# Altium PCB XDRONE.PcbDoc (part 2 of 2)
Units mm, origin at the board's own origin, x right, y up, seen from the top; angles counter-clockwise.
Board outline 106 x 156 mm, 4 copper layers (Top Layer, Signal Layer 2, Signal Layer 1, Bottom Layer), stack 1.586 mm thick; 129 components, 64 nets, 369 pads, 526 vias.
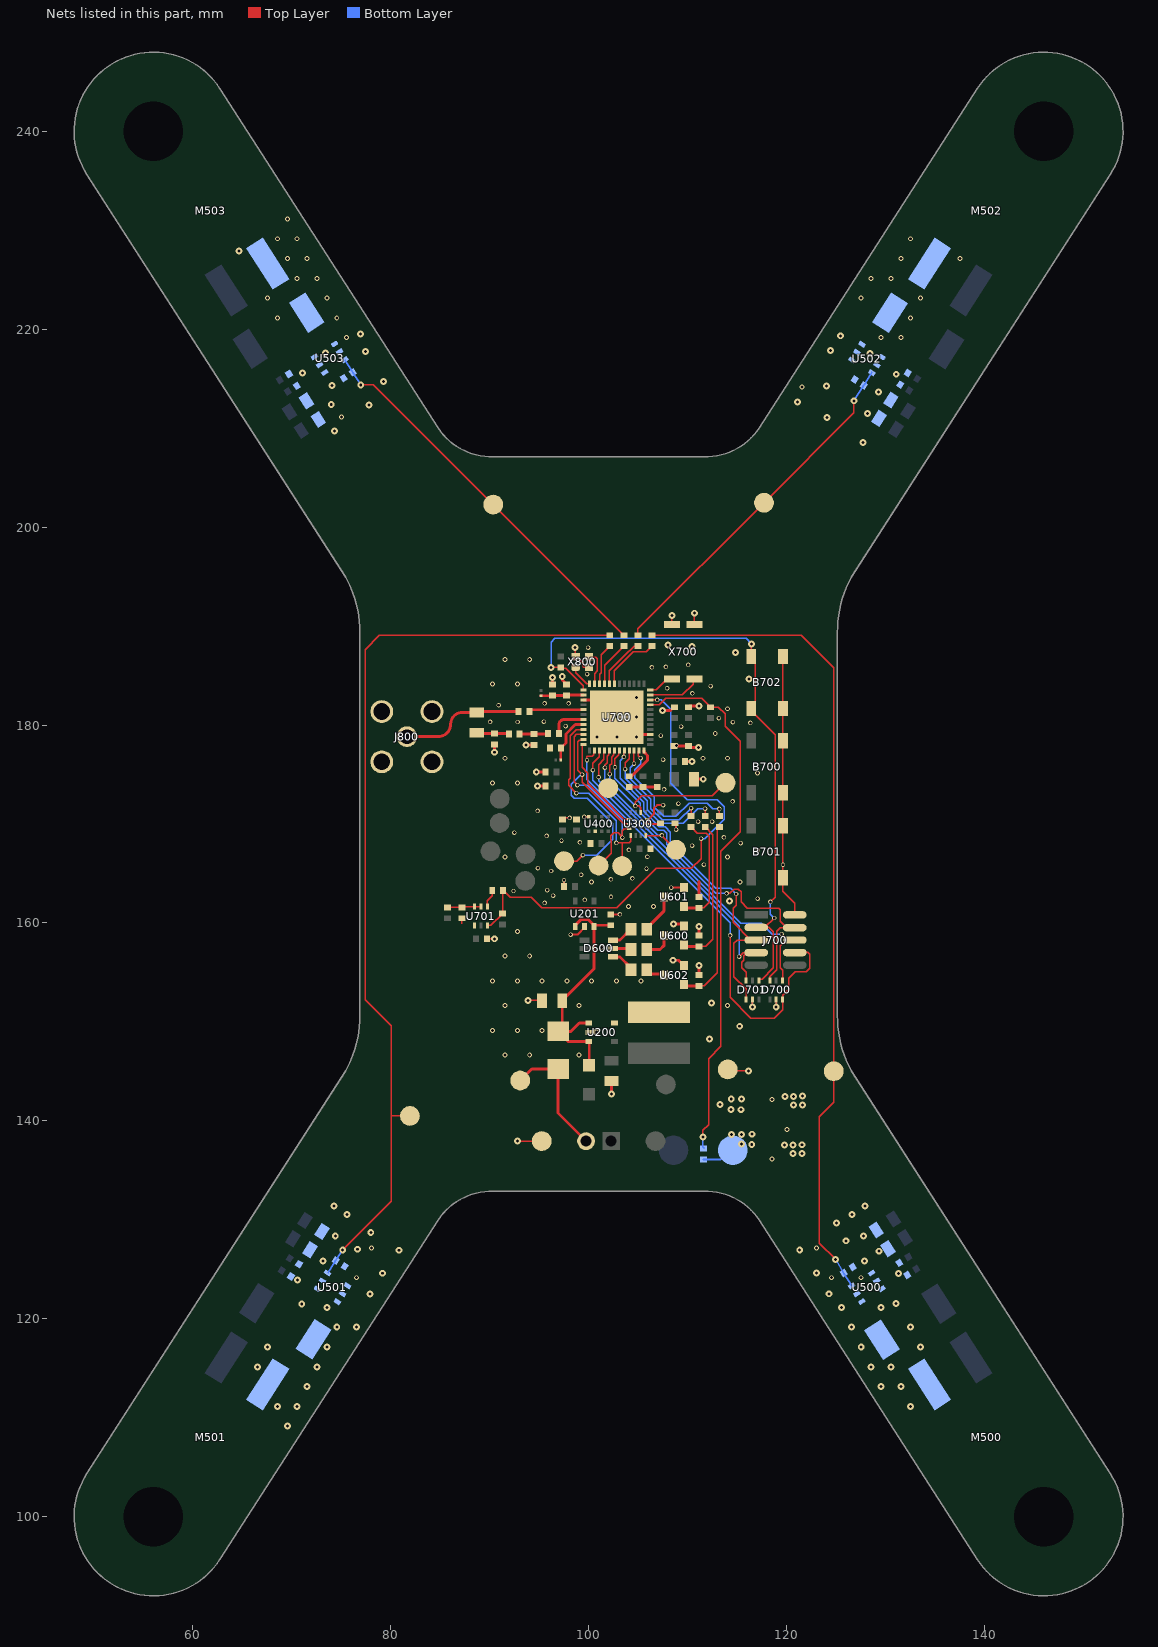
[diagram p4: the nets of this part, all layers, seen from the top]

## Via types
v1: diameter 0.5, hole 0.3, Top Layer to Bottom Layer, tented both sides, 240 vias
v2: diameter 0.7, hole 0.3, Top Layer to Bottom Layer, tented both sides, 186 vias
v3: diameter 0.45, hole 0.3, Top Layer to Bottom Layer, tented both sides, 100 vias

## Nets (pads, with @x,y where several pads share a name; then routed paths per layer and width w, separated by ;. In a path a pad name is that pad's centre, name@x,y a point inside that pad or via, vN(x,y) a via of type N, cw(c..) or ccw(c..) an arc to the next point about the centre after c; other vN are vias at no path point) (continued)
GND: B700.1 B700.2 B701.1 B701.2 B702.1 B702.2 C200.1 C201.2 C202.1 C203.1 C300.1 C301.1 C302.2 C400.1 C401.1 C402.2 C500.1 C501.1 C502.1 C503.1 C504.1 C505.1 C506.1 C507.1 C508.1 C509.1 C510.1 C511.1 C512.1 C513.1 C514.1 C515.1 C801.1 C802.2 C803.2 C804.2 C805.2 C806.2 C807.2 C808.2 C809.2 C810.2 C811.1 C812.1 C813.1 C814.1 C815.1 C816.1 D700.2 D701.2 J101.2 J700.2 J800.1 J800.2 J800.3 J800.4 P102.1 P103.1 R502.1 R503.1 R506.1 R507.1 R606.1 R607.1 R608.1 R702.1 R703.1 R704.1 R706.1 U200.2 U201.2 U300.6 U300.7 U400.1 U400.7 U500.4 U501.4 U502.4 U503.4 U600.2 U601.2 U602.2 U700.0 U700.15 U700.39 U701.1 U701.4 X700.2 X700.3 X800.2 X800.4 | length 80.3
  Top Layer w0.15: 87.175,159.9 R703.1@87.175,160.475 ; R704.1@89.725,158.4 v2(90.5,158.4) ; U701.4@89.75,161.65 89.75,162.25 90.25,162.75 R702.1@90.25,163.3 ; v2(92.8,137.95) P102.1@95.25,137.95 ; v2(93.875,152.175) C200.1@95.25,152.175 ; C401.1@97.35,170.45 97.525,170.625 v3(98.075,170.625) ; v2(98.625,187.825) 98.625,186.95 X800.4@98.675,186.9 98.777,186.9 98.777,186.898 99.375,186.3 99.375,185.925 99.45,185.85 X800.2@100.025,185.85 ; C400.1@98.75,170.45 C400.1@98.8,170.5 ; v3(99.55,170.725) U400.1@100.025,170.725 ; X700.3@108.4,190.175 v2(108.4,191.05) ; v2(110.675,191.3) 110.675,190.2 X700.2@110.7,190.175 ; P103.1@114.2,145.05 v2(116.15,145.05) ; v2(116.55,151.5) D701.2@116.55,152.275 ; v2(118.95,151.5) D700.2@118.95,152.275 ; B701.2@119.625,164.575 119.59,164.54 119.59,163.22 120.825,161.985 J700.2@120.825,160.815 ; B701.2@119.625,164.85 119.625,165.875 B701.1@119.625,169.825 B700.2@119.625,173.175 B700.1@119.625,178.425 B702.2@119.625,181.675 B702.1@119.625,186.925
  Top Layer w0.2: C203.1@97.5,163.67 v3(97.5,164.33) ; v3(98.17,158.83) 98.864,158.83 99.59,159.556 U201.2@99.59,159.63 ; C202.1@102.23,160.87 v3(103.14,160.87) ; C300.1@107.25,170.075 107.175,170 U300.6@105.913,170 U300.7@105.913,170.5 106.08,170.5 106.59,171.01 106.59,171.589 106.911,171.91 v3(107.52,171.91) ; v3(108.34,163.58) U601.2@109.625,163.58 ; C301.1@108.7,170.075 108.84,169.935 v3(108.84,169.43)
  Top Layer w0.293: U200.2@100,148.95 100.05,149 v2(100.8,149) ; v2(102.3,142.7) C201.2@102.3,144.025 ; v2(108.525,156.23) 109.075,156.23 U602.2@109.625,155.68
  Top Layer w0.3: v2(90.475,177.25) C802.2@90.475,178.05 ; v2(93.675,177.975) C801.1@94.475,177.975 ; v2(94.7,175.275) C811.1@95.625,175.275 ; v2(94.825,173.85) C812.1@95.625,173.85 ; C814.1@96.35,184.1 v2(96.35,184.8) ; v2(97.325,184.9) 97.325,184.55 C815.1@97.775,184.1 ; U700.15@99.475,182.55 U700.0@101.1,182.55 ; C816.1@104.1,173.725 C810.2@105.5,173.725 C809.2@106.9,173.725 ; U700.0@104.6,179.05 U700.39@106.225,179.05 ; v2(107.45,181.47) 108.27,181.47 108.625,181.825 C803.2@108.65,181.8 ; v2(108.55,159.88) 109.425,159.88 U600.2@109.625,159.68 ; C805.2@108.625,177.875 C806.2@110.075,177.875 110.225,177.725 v2(111.075,177.725) ; C807.2@109.725,176.325 v2(110.425,176.325) ; C804.2@110.075,181.8 110.184,181.909 v2(111.13,181.909) ; C808.2@110.65,174.525 v2(111.575,174.525) ; R608.1@111.15,154.78 v2(111.15,155.68) ; R606.1@111.15,158.73 v2(111.15,159.63) ; R607.1@111.15,162.63 111.16,162.64 111.16,164.21
  Bottom Layer w0.2: R706.1@111.62,136.09 113.31,136.09 113.33,136.07
  other v1: 76.539,124.146 124.539,124.146 127.539,124.146 78.039,127.146 123.039,127.146 118.539,136.146 120.039,139.146 118.539,142.146 91.539,146.646 94.039,146.646 99.039,146.646 90.289,149.146 92.789,149.146 95.289,149.146 91.539,151.646 99.039,151.646 114.039,151.646 90.289,154.146 92.789,154.146 95.289,154.146 97.789,154.146 100.289,154.146 102.789,154.146 105.289,154.146 91.539,156.646 94.039,156.646 101.29,157.51 92.789,159.146 104.039,161.646 106.539,161.646 100.289,164.146 115.289,164.146 91.539,166.646 114.039,166.646 90.289,174.146 92.789,174.146 117.039,175.146 91.539,176.646 111.539,176.646 114.039,176.646 112.789,179.146 114.039,181.646 90.289,184.146 92.789,184.146 91.539,186.646 94.039,186.646 75.039,211.146 121.539,214.146
  other v2: 77.888,122.499 124.275,122.525 70.59,123.9 131.31,124.56 79.138,124.599 123.025,124.625 73.14,125.82 127.875,125.85 129.325,126.825 80.838,126.924 121.325,126.95 76.638,127.024 126.01,127.88 74.388,128.349 127.775,128.375 77.975,128.7 125.02,129.68 75.563,130.524 126.6,130.55 74.263,131.374 127.9,131.4 120.64,136.71 121.54,136.71 119.765,137.56 120.64,137.56 121.54,137.585 116.475,137.625 115.425,137.675 114.425,138.625 115.425,138.625 116.5,138.65 115.405,141.125 114.38,141.15 120.7,141.62 121.6,141.62 113.28,141.65 115.43,142.2 114.405,142.225 119.825,142.47 120.7,142.47 121.6,142.495 112.21,148.29 115.26,149.56 112.41,151.93 114.22,162.21 100.85,178.8 102.85,178.8 104.85,178.8 102.85,180.8 104.85,180.8 104.85,182.8 116.18,184.66 114.825,187.35 110.425,187.95 108.025,188.075 127.72,208.56 74.32,209.7 124.07,211.07 128.19,211.49 77.78,212.36 73.98,212.39 121.1,212.66 129.27,213.66 124.02,214.26 74.06,214.32 79.26,214.71 131.08,215.45 71.06,215.57 77.44,217.77 124.43,217.87
  other v3: 95.54,162.02 99.6,162.33 117.07,162.46 102.25,162.64 96.41,162.77 92.4,163.23 95.81,163.32 102.23,164.41 104.42,164.51 99.24,164.87 96.21,165.25 105.84,165.5 94.86,165.55 111.64,165.89 119.635,165.881 105.92,166.69 104.06,167.39 117.1,167.37 110.45,167.82 115.36,168.06 99.1,168.14 97.25,168.32 113.66,168.64 95.74,168.8 92.48,169.12 111.06,170.23 112.48,170.25 94.83,171.32 109.05,172.06 114.54,172.28 107.63,173.5 107.53,176.51 108.86,177.94 107.28,178.94 109.34,179.84 97.675,179.9 116.34,180.21 92.81,180.31 114.57,180.3 90.03,180.33 95.47,180.34 113.16,180.69 90.9,182 95.55,182.2 97.975,182.2 110.475,183.2 107.92,183.72 112.325,183.925 99.85,185.14 106.38,185.82 107.8,185.87 110.06,186.09 99.94,187.82
GYRO_CS#: P301.1 U300.12 U700.24 | length 11
  Top Layer w0.15: U700.24@99.475,178.05 99.325,177.9 99.325,175.75 99.925,175.15 99.925,174.125 101.3,172.75 ; P301.1@101.975,173.625 101.3,172.75 ; U300.12@104.087,170.5 103.55,170.5 101.3,172.75
GYRO_INT1: P302.1 U300.4 U700.29 | length 15
  Top Layer w0.15: v3(101.625,175.7) 101.625,175.918 101.875,176.168 101.875,176.836 102.025,176.986 102.025,177.35 U700.29@102.1,177.425 ; U300.4@105.763,168.825 107.4,168.825 P302.1@108.825,167.4
  Bottom Layer w0.15: v3(101.625,175.7) 101.625,174.218 106.993,168.85 v3(107.39,168.85)
GYRO_INT2: P303.1 U300.9 U700.30 | length 18.3
  Top Layer w0.15: v3(102.125,175.05) 102.125,175.923 102.305,176.103 102.305,176.761 102.525,176.981 102.525,177.35 U700.30@102.6,177.425 ; U300.9@105.25,171.162 105.25,171.65 105.06,171.84 v3(104.71,171.84) 104.71,172.2 105.36,172.85 112.5,172.85 P303.1@113.825,174.175
  Bottom Layer w0.15: v3(102.125,175.05) 102.125,174.425 v3(104.71,171.84)
GYRO_MISO: P304.1 U300.1 U700.21 | length 19.7
  Top Layer w0.15: v3(98.75,173.125) 97.975,173.9 97.975,174.45 98.125,174.6 98.125,178.924 98.751,179.55 U700.21@99.475,179.55 ; v3(102.8,168.1) 103.375,168.1 ; P304.1@103.375,165.75 103.375,168.1 ; U300.1@104.25,168.838 104.25,168.275 104.075,168.1 103.375,168.1
  Bottom Layer w0.15: v3(98.75,173.125) 99.985,173.125 102.8,170.31 v3(102.8,168.1)
GYRO_MOSI: P305.1 U300.14 U700.22 | length 20.3
  Top Layer w0.15: v3(98.85,173.925) 98.525,174.25 98.525,178.829 98.746,179.05 U700.22@99.475,179.05 ; P305.1@101,165.8 102.255,167.055 102.255,168.363 102.25,168.368 102.25,168.81 102.548,169.108 102.962,169.108 v3@103.405,168.665 ; v3(103.405,168.633) v3@103.405,168.665 ; U300.14@104.087,169.5 103.6,169.5 103.405,169.305 v3@103.405,168.665
  Bottom Layer w0.15: v3(98.85,173.925) 99.915,173.925 103.405,170.435 v3(103.405,168.633)
GYRO_SCK: P300.1 U300.13 U700.23 | length 26.9
  Top Layer w0.15: P300.1@97.5,166.25 98.8,166.25 v3(99.4,166.85) ; U700.23@99.475,178.55 99.4,178.475 99.036,178.475 98.875,178.314 98.875,175.45 v3(99.325,175) 99.325,174.23 103.53,170.025 104.062,170.025 U300.13@104.087,170
  Bottom Layer w0.15: v3(99.325,175) 99.218,175 98.25,174.032 98.25,172.918 98.543,172.625 99.855,172.625 102.43,170.05 102.43,168.45 100.83,166.85 v3(99.4,166.85)
LED_BLUE: R605.1 U700.35 | length 15.4
  Top Layer w0.15: U700.35@105.1,177.425 105.025,177.35 105.025,176.875 v3(105.25,176.65) ; R605.1@113.2,170.8 v3(113.2,171.525)
  Bottom Layer w0.15: v3(105.25,176.65) 105.25,176.068 104.67,175.488 104.67,174.68 106.61,172.74 106.61,171.708 107.558,170.76 108.803,170.76 110.143,172.1 111.96,172.1 112.535,171.525 v3(113.2,171.525)
LED_GREEN: R604.1 U700.34 | length 12.8
  Top Layer w0.15: v3(104.575,176.1) 104.575,177.4 U700.34@104.6,177.425 ; R604.1@110.35,170.8 v3(110.35,171.6)
  Bottom Layer w0.15: v3@104.6,176.084 104.18,175.663 104.18,174.59 106.26,172.51 106.26,171.563 107.413,170.41 109.16,170.41 v3(110.35,171.6)
LED_RED: R603.1 U700.33 | length 14.9
  Top Layer w0.15: v3(103.675,175.55) 103.675,176.193 104.1,176.618 U700.33@104.1,177.425 ; R603.1@111.775,170.8 v3(111.775,171.55)
  Bottom Layer w0.15: v3(103.675,175.55) 103.675,174.6 105.91,172.365 105.91,171.418 107.268,170.06 109.53,170.06 111.02,171.55 v3(111.775,171.55)
MOTOR_DOWN_LEFT: R504.1 U700.8 | length 5.2
  Top Layer w0.15: U700.8@102.1,184.175 102.1,185.49 104.01,187.4 104.014,187.4 104.175,187.561 104.175,187.565 104.585,187.975 R504.1@104.975,187.975
MOTOR_DOWN_RIGHT: R505.1 U700.9 | length 4.6
  Top Layer w0.15: U700.9@101.6,184.175 101.6,186.025 R505.1@103.55,187.975
MOTOR_UP_LEFT: R500.1 U700.7 | length 6.1
  Top Layer w0.15: U700.7@102.6,184.175 102.6,185.495 104.155,187.05 104.159,187.05 104.509,187.4 105.825,187.4 R500.1@106.4,187.975
MOTOR_UP_RIGHT: R501.1 U700.10 | length 4.2
  Top Layer w0.15: U700.10@101.1,184.175 101.1,185.15 101.25,185.3 101.25,187.1 R501.1@102.125,187.975
NetC800_1: C800.1 C802.1 L801.2 | length 3.3
  Top Layer w0.293: C800.1@88.675,179.225 88.675,179.15 C802.1@90.475,179.15 L801.2@91.925,179.15
NetC800_2: C800.2 J800.5 L800.2 | length 12.8
  Top Layer w0.293: J800.5@81.631,178.831 J800.5@81.625,178.825 84.775,178.825 ccw(c84.775,180.1) 86.05,180.1 cw(c87.225,180.1) 87.225,181.275 C800.2@88.675,181.275 88.675,181.35 L800.2@92.925,181.35
NetC801_2: C801.2 L801.1 L802.2 | length 2.9
  Top Layer w0.293: L801.1@93.025,179.1 94.475,179.1 95.9,179.1 L802.2@95.9,179.125
NetC813_2: C813.2 L803.1 U700.20 | length 5
  Top Layer w0.25: L803.1@97.187,176.475 C813.2@97.187,177.662
  Top Layer w0.3: C813.2@97.187,177.662 C813.2@97.2,177.675 97.7,178.175 97.7,179.1 98.65,180.05 U700.20@99.475,180.05
NetC814_2: C814.2 C815.2 L804.1 U700.14 | length 4.3
  Top Layer w0.25: L804.1@95.175,182.963 C814.2@96.312,182.963
  Top Layer w0.3: C814.2@96.312,182.963 C814.2@96.35,183 C815.2@97.775,183 97.825,183.05 U700.14@99.475,183.05
NetC816_2: C816.2 U700.36 | length 3.6
  Top Layer w0.3: C816.2@104.1,174.825 104.325,174.825 105.94,176.44 105.94,176.92 105.6,177.26 U700.36@105.6,177.425
NetD201_2: D201.2 J100.2 P101.1 | length 12.8
  Top Layer w0.293: P101.1@93.075,144.075 94.25,145.25 D201.2@96.9,145.25 96.9,140.78 J100.2@99.73,137.95
NetD500_2: D500.2 M500.2 U500.1 U500.2 U500.5 U500.6
  other v2: 132.539,111.146 129.539,113.146 131.539,113.146 128.539,115.146 130.539,115.146 127.539,117.146 133.539,117.146 126.539,119.146 132.539,119.146 125.539,121.146 129.539,121.146 131.075,121.525
NetD501_2: D501.2 M501.1 U501.1 U501.2 U501.5 U501.6
  other v2: 69.539,109.146 68.539,111.146 70.539,111.146 71.539,113.146 66.539,115.146 72.539,115.146 67.539,117.146 73.539,117.146 74.539,119.146 76.539,119.146 73.539,121.146 71,121.5
NetD502_2: D502.2 M502.1 U502.1 U502.2 U502.5 U502.6
  other v1: 129.539,219.146 131.539,219.146 132.539,221.146 127.539,223.146 133.539,223.146 128.539,225.146 130.539,225.146 131.539,227.146 137.539,227.146 132.539,229.146
  other v2: 128.44,217.55 125.46,219.34
NetD503_2: D503.2 M503.2 U503.1 U503.2 U503.5 U503.6
  other v1: 75.539,219.146 68.539,221.146 74.539,221.146 67.539,223.146 73.539,223.146 70.539,225.146 72.539,225.146 69.539,227.146 71.539,227.146 68.539,229.146 70.539,229.146 69.539,231.146
  other v2: 73.42,217.59 76.92,219.53 64.64,227.9
NetD600_1: D600.1 R602.2 | length 2.5
  Top Layer w0.3: D600.1@102.46,156.57 103.17,156.57 104.26,155.48 R602.2@104.26,155.27
NetD600_3: D600.3 R600.2 | length 1.8
  Top Layer w0.2: D600.3@102.46,157.42 D600.3@102.56,157.32
  Top Layer w0.3: D600.3@102.46,157.42 R600.2@104.16,157.42
NetD600_5: D600.5 R601.2 | length 2.3
  Top Layer w0.3: D600.5@102.46,158.27 103.16,158.27 R601.2@104.26,159.37
NetL200_1: L200.1 U200.5
NetL800_1: L800.1 U700.17 | length 5.6
  Top Layer w0.293: L800.1@94.025,181.35 94.025,181.55 U700.17@99.475,181.55
NetL802_1: L802.1 U700.19 | length 3.7
  Top Layer w0.293: L802.1@97,179.125 97,180.073 cw(c97.477,180.073) 97.477,180.55 U700.19@99.475,180.55
NetP500_1: P500.1 R500.2 R502.2 U500.3 | length 84.1
  Top Layer w0.15: R500.2@106.4,189.075 121.47,189.075 124.76,185.785 124.76,141.885 123.3,140.425 123.3,127.64 v2(124.95,125.99)
  Bottom Layer w0.15: v2(124.95,125.99) R502.2@125.767,124.623 U500.3@126.577,123.325 ; U500.3@126.499,123.448 126.574,123.324 U500.3@126.576,123.32
NetP501_1: P501.1 R501.2 R503.2 U501.3 | length 93.8
  Top Layer w0.15: v2(75.14,126.96) 80.05,131.87 80.05,140.5 ; P501.1@81.925,140.5 80.05,140.5 ; R501.2@102.125,189.075 78.856,189.075 77.404,187.623 77.404,152.246 80.05,149.6 80.05,140.5
  Bottom Layer w0.15: U501.3@73.604,124.623 R503.2@74.437,125.897 v2(75.14,126.96)
NetP502_1: P502.1 R504.2 R506.2 U502.3 | length 36.4
  Top Layer w0.15: R504.2@104.975,189.075 104.975,189.725 P502.1@117.72,202.47 126.8,211.55 v2(126.8,212.77)
  Bottom Layer w0.15: v2(126.8,212.77) R506.2@127.793,214.323 ; R506.2@127.67,214.13 U502.3@128.663,215.683
NetP503_1: P503.1 R505.2 R507.2 U503.3 | length 40.1
  Top Layer w0.15: v2(76.962,214.375) 78.25,214.375 R505.2@103.55,189.075
  Bottom Layer w0.15: U503.3@75.343,216.92 R507.2@76.153,215.647 v2(76.962,214.375)
NetR600_1: R600.1 U600.3 | length 2.9
  Top Layer w0.3: R600.1@105.86,157.32 107.2,157.32 107.625,157.745 U600.3@107.625,158.73
NetR601_1: R601.1 U601.3 | length 4.1
  Top Layer w0.15: R601.1@105.86,159.37 R601.1@105.86,159.49
  Top Layer w0.3: R601.1@105.86,159.37 105.86,159.47 107.625,161.235 U601.3@107.625,162.63
NetR602_1: R602.1 U602.3 | length 2.3
  Top Layer w0.3: R602.1@105.86,155.27 105.86,154.87 105.84,154.85 107.505,154.85 U602.3@107.625,154.73
NetR603_2: R603.2 R606.2 U600.1 | length 15
  Top Layer w0.15: R606.2@111.15,157.63 111.85,157.63 112.55,158.33 112.55,168.925 R603.2@111.775,169.7
  Top Layer w0.3: U600.1@109.625,157.78 109.775,157.63 R606.2@111.15,157.63
NetR604_2: R604.2 R607.2 U601.1 | length 11.8
  Top Layer w0.15: R604.2@110.35,169.7 110.96,169.09 111.89,169.09 112.2,168.78 112.2,162.08 111.65,161.53 R607.2@111.15,161.53
  Top Layer w0.3: U601.1@109.625,161.68 109.775,161.53 R607.2@111.15,161.53
NetR605_2: R605.2 R608.2 U602.1 | length 18.8
  Top Layer w0.15: R608.2@111.15,153.63 111.655,153.63 113,154.975 113,169.5 R605.2@113.2,169.7
  Top Layer w0.3: U602.1@109.625,153.78 109.775,153.63 R608.2@111.15,153.63
NetR701_1: R701.1 R703.2 U701.5 U701.6 | length 3.3
  Top Layer w0.15: R701.1@85.725,161.575 R703.2@87.175,161.575 ; R703.2@87.25,161.65 U701.6@88.45,161.65 U701.5@89.1,161.65
NetU700_11: U700.11 X800.3 | length 3.6
  Top Layer w0.15: X800.3@100.061,186.9 X800.3@100.025,186.9 100.075,186.85 100.7,186.85 100.875,186.675 100.875,185.475 100.6,185.2 U700.11@100.6,184.175
NetU700_12: U700.12 X800.1 | length 2.4
  Top Layer w0.15: X800.1@98.675,185.85 98.711,185.814 98.711,185.289 99.825,184.175 U700.12@100.1,184.175
NetU700_47: U700.47 X700.1 | length 5.4
  Top Layer w0.15: U700.47@106.225,183.05 109.475,183.05 110.55,184.125 110.55,184.525 X700.1@110.7,184.675
NetU700_48: U700.48 X700.4 | length 2.6
  Top Layer w0.15: U700.48@106.225,183.55 106.825,183.55 107.95,184.675 X700.4@108.4,184.675
PC_RX: D700.6 J700.4 U700.31 | length 36.5
  Top Layer w0.15: v3(102.655,175.734) 102.655,176.616 103.025,176.986 103.025,177.35 U700.31@103.1,177.425 ; v3(113.93,162.99) 114.258,162.99 114.693,163.425 115.107,163.425 115.4,163.132 115.4,162.132 116.022,161.51 119.19,161.51 119.35,161.35 119.35,160.175 120.01,159.515 J700.4@120.825,159.515 ; D700.6@118.3,154.175 118.3,154.55 119,155.25 119,159.175 119.34,159.515 J700.4@119.81,159.515
  Bottom Layer w0.15: v3(102.655,175.734) 102.655,174.63 105.21,172.075 105.21,171.128 106.988,169.35 107.597,169.35 107.901,169.046 107.901,167.941 112.853,162.99 v3(113.93,162.99)
PC_TX: D701.1 J700.5 U700.32 | length 34.5
  Top Layer w0.15: v3(103.55,176.775) 103.55,177.375 U700.32@103.6,177.425 ; v3(114.9,162.925) 114.9,161.811 114.585,161.496 114.585,160.065 116.375,158.275 J700.5@116.925,158.275 ; D701.1@115.9,152.275 115.9,153.336 114.675,154.561 114.675,157.95 115,158.275 J700.5@116.075,158.275
  Bottom Layer w0.15: v3(103.55,176.775) 103.175,176.4 103.175,174.605 105.56,172.22 105.56,171.273 107.133,169.7 107.742,169.7 108.251,169.191 108.251,168.086 112.848,163.49 114.335,163.49 v3(114.9,162.925)
RESETN: B702.3 B702.4 D701.4 J700.3 R800.1 U700.13 | length 66.6
  Top Layer w0.15: v2(96.2,185.825) R800.1@97.175,185.825 97.278,185.722 97.675,185.722 99.45,183.947 99.45,183.575 U700.13@99.475,183.55 ; J700.3@116.22,159.545 J700.3@116.925,159.545 J700.3@117.795,159.545 ; v2(116.45,188.2) 116.45,186.95 116.805,186.955 116.805,181.705 116.425,181.425 118.83,179.02 118.83,162.616 v3(118.35,162.136) ; D701.4@117.338,154.313 117.513,154.313 118.65,155.45 118.65,159.1 118.205,159.545 J700.3@117.795,159.545 ; v3(118.75,160.5) J700.3@117.795,159.545
  Bottom Layer w0.15: v2(96.2,185.825) 96.2,188.375 96.575,188.75 115.9,188.75 v2(116.45,188.2) ; v3(118.35,162.136) 118.35,160.9 v3(118.75,160.5)
SWCLK: D700.3 J700.8 U700.26 | length 47.1
  Top Layer w0.15: v3(99.825,176.45) 99.825,176.775 99.875,176.825 100.364,176.825 100.525,176.986 100.525,177.35 U700.26@100.6,177.425 ; v3(114.3,158.75) 114.3,152.475 116.4,150.375 118.775,150.375 119.625,151.225 119.625,152.25 D700.3@119.6,152.275 119.6,152.68 120.22,153.3 120.22,154.42 120.885,155.085 122.005,155.085 122.32,155.4 122.32,156.83 122.125,157.025 120.845,157.025 J700.8@120.825,157.005
  Bottom Layer w0.15: v3(99.825,176.45) 99.825,174.505 100.055,174.275 100.06,174.275 114.3,160.035 v3(114.3,158.75)
SWDIO: D701.6 J700.7 U700.27 | length 32.4
  Top Layer w0.15: v3(100.43,175.434) 100.43,176.155 101.05,176.775 101.05,177.375 U700.27@101.1,177.425 ; v3(115.2,156.6) 115.605,157.005 J700.7@116.005,157.005 ; D701.6@115.9,154.175 115.9,155.016 115.45,155.466 115.45,156.004 115.675,156.229 115.675,156.675 J700.7@116.005,157.005 ; J700.7@116.925,157.005 J700.7@116.005,157.005
  Bottom Layer w0.15: v3(100.43,175.434) 100.43,174.423 115.2,159.653 v3(115.2,156.6)
SWO: D700.4 J700.6 U700.28 | length 33.4
  Top Layer w0.15: v3(101,174.725) 101,176 101.525,176.525 101.525,177.35 U700.28@101.6,177.425 ; v3(119.5,158.875) 119.9,158.475 119.9,158.225 119.35,157.675 119.35,155.466 119.6,155.216 D700.4@119.6,154.175
  Bottom Layer w0.15: v3(101,174.725) 101,174.348 115.358,159.99 117.44,159.99 118.555,158.875 v3(119.5,158.875)
TEMP: R705.1 R706.2 U700.45 | length 54.8
  Top Layer w0.15: U700.45@106.3,181.975 U700.45@106.225,182.05 107.132,182.05 107.782,182.7 111.425,182.7 R705.1@112.325,181.8 113.1,181.8 113.775,181.125 113.775,179.885 115.3,178.36 115.3,169.2 113.35,167.25 113.35,147.525 112.125,146.3 112.125,139.625 111.53,139.03 v2(111.53,138.35)
  Bottom Layer w0.15: v2(111.53,138.35) 111.53,137.38 111.67,137.24 R706.2@111.62,137.19
VBATT/2: R700.1 R702.2 U700.46 U701.3 | length 50.1
  Top Layer w0.15: U701.3@89.75,159.75 90.1,159.75 R700.1@91.3,160.95 91.3,163.25 R702.2@91.35,163.3 92.075,162.575 94.215,162.575 95.27,161.52 102.82,161.52 106.825,165.525 110.375,165.525 111.35,166.5 v3(111.35,168.53) ; U700.46@106.25,182.525 U700.46@106.225,182.55 v3(106.925,182.55)
  Bottom Layer w0.15: v3@107.015,182.64 v3(106.925,182.55) 107.35,182.55 108.3,181.6 108.3,174.125 109.975,172.45 112.982,172.45 113.7,171.732 113.7,170.49 111.74,168.53 v3(111.35,168.53)
VJUMP_D: C200.2 C202.2 D200.1 D201.1 U200.1 U200.3 U201.1 U201.3 | length 25.9
  Top Layer w0.293: U201.1@98.64,159.63 98.64,159.77 99.196,160.327 99.984,160.327 100.54,159.77 U201.3@100.54,159.63 ; U200.1@100,149.9 99.997,149.903 99.053,149.903 98.2,149.05 D201.1@96.9,149.05 ; D200.1@100.05,145.625 100.05,147.95 U200.3@100,148 97.95,148 D201.1@96.9,149.05 ; C202.2@102.23,159.77 100.68,159.77 U201.3@100.54,159.63 ; D201.1@96.9,149.05 97.325,149.475 C200.2@97.325,152.15 100.54,155.365 U201.3@100.54,159.63
pads on no net: D700.1 D700.5 D701.3 D701.5 J700.9 J700.10 M500.0 M501.0 M502.0 M503.0 U201.4 U300.10 U300.11 U700.16 U700.18 U700.25 U700.37 U700.43 U700.44
copper on no net: | length 480.7
  Top Layer w3: v2(60.5,100) ccw(c56,100) v2(60.5,100) ; v2(60.5,240) ccw(c56,240) v2(60.5,240) ; v2(150.5,100) ccw(c146,100) v2(150.5,100) ; v2(150.5,240) ccw(c146,240) v2(150.5,240)
  Signal Layer 2 w3: v2(60.5,100) ccw(c56,100) v2(60.5,100) ; v2(60.5,100) ccw(c56,100) v2(60.5,100) ; v2(60.5,240) ccw(c56,240) v2(60.5,240) ; v2(150.5,100) ccw(c146,100) v2(150.5,100) ; v2(150.5,240) ccw(c146,240) v2(150.5,240)
  Signal Layer 1 w3: v2(60.5,100) ccw(c56,100) v2(60.5,100) ; v2(60.5,240) ccw(c56,240) v2(60.5,240) ; v2(150.5,100) ccw(c146,100) v2(150.5,100) ; v2(150.5,240) ccw(c146,240) v2(150.5,240)
  Bottom Layer w3: v2(60.5,100) ccw(c56,100) v2(60.5,100) ; v2(60.5,240) ccw(c56,240) v2(60.5,240) ; v2(150.5,100) ccw(c146,100) v2(150.5,100) ; v2(150.5,240) ccw(c146,240) v2(150.5,240)
  other v2: 56,95.5 146,95.5 53,96.75 143,96.75 59.25,97 149.25,97 51.5,100 141.5,100 59.25,102.75 149.25,102.75 52.75,103 142.75,103 56,104.5 146,104.5 56,235.5 146,235.5 53,236.75 143,236.75 59.25,237 149.25,237 51.5,240 141.5,240 59.25,242.75 149.25,242.75 52.75,243 142.75,243 56,244.5 146,244.5

## Polygon pours and split planes (outlines as drawn)
GND on Bottom Layer "GND" (solid, remove dead copper, pour order 22): 68.894,215.73 76.745,220.818 81.158,213.543 73.497,208.624
GND on Bottom Layer "GND" (solid, remove dead copper, pour order 13): 116.342,145.425 116.342,188.125 89.902,188.125 89.902,145.425
BATT on Bottom Layer "VBATT" (solid, remove dead copper, pour order 18): 38.2,255 162.2,255 162.2,85 38.2,85 38.2,255
GND on Bottom Layer "GND" (solid, remove dead copper, pour order 17): 112.302,135.421 112.302,142.821 122.85,143.081 122.85,135.421
GND on Bottom Layer "GND" (solid, remove dead copper, pour order 21): 120.132,212.486 127.865,207.474 132.901,215.775 125.388,220.6
GND on Bottom Layer "GND" (solid, remove dead copper, pour order 20): 120.105,127.136 127.838,132.148 132.873,123.847 125.36,119.022
GND on Bottom Layer "GND" (solid, remove dead copper, pour order 19): 82.122,127.387 74.441,132.365 69.276,123.85 76.73,119.063
GND on Signal Layer 1 "GND" (solid, remove dead copper, pour order 15): 38.2,255 162.2,255 162.2,85 38.2,85
GND on Signal Layer 2 "GND" (solid, remove dead copper, pour order 14): 38.2,255 162.2,255 162.2,85 38.2,85 38.2,255
BATT on Top Layer "VBATT" (solid, remove dead copper, pour order 16): 38.2,255.06 162.2,255.06 162.2,85.06 38.2,85.06 38.2,255.06
GND on Top Layer "GND" (solid, remove dead copper, pour order 12): 117.512,145.21 117.512,188.442 86.912,188.442 86.912,145.21

## Keep-outs
Keep-Out Layer:
  lines w0.1: 62.72,95.659 cw(c56,100) 49.28,104.341 75.46,145.064 ccw(c65.028,150.669) 76.87,150.67 76.87,189.33 ccw(c65.028,189.331) 75.46,194.936 49.28,235.659 cw(c56,240) 62.72,244.341 ; 62.729,95.674 84.778,129.971 ; 62.729,244.326 84.778,210.029 ; 84.78,129.97 cw(c90.142,126.475) 90.352,132.872 111.648,132.872 cw(c111.858,126.475) 117.22,129.97 ; 84.78,210.03 ccw(c90.142,213.525) 90.352,207.128 111.648,207.128 ccw(c111.858,213.525) 117.22,210.03 ; 117.222,129.971 139.271,95.674 ; 117.222,210.029 139.271,244.326 ; 139.28,95.659 ccw(c146,100) 152.72,104.341 126.54,145.064 cw(c136.972,150.669) 125.13,150.67 125.13,189.33 cw(c136.972,189.331) 126.54,194.936 152.72,235.659 ccw(c146,240) 139.28,244.341

## Other copper
Top Layer:
  pour cut-out: 106.584,174.44 102.225,174.44 102.225,172.18 106.594,172.18
  pour cut-out: 107.83,172.08 107.82,172.09 105.57,172.09 105.57,169.72 107.84,169.72
  region net NetD501_2: 63.919,112.125 69.944,108.275 77.956,121 72.131,124.775
  region net 3V3: 101.5,145.4 101.5,149.3 111.2,149.3 111.2,145.4
  region net NetL200_1: 101.5,149.6 101.5,153.1 111.2,153.1 111.2,149.6
  region net NetD500_2: 138.156,112.15 132.131,108.3 124.119,121.025 129.944,124.8
  region net NetD503_2: 63.642,228.128 69.667,231.978 77.679,219.253 71.854,215.478
  region net NetD502_2: 138.463,227.988 132.438,231.838 124.426,219.113 130.251,215.338
Signal Layer 2:
  region net NetD502_2: 138.463,227.988 132.438,231.838 124.426,219.113 130.251,215.338
  region net NetD503_2: 63.635,228.128 69.66,231.978 77.673,219.253 71.848,215.478
  region net NetD501_2: 63.919,112.125 69.944,108.275 77.956,121 72.131,124.775
  region net NetD500_2: 138.162,112.15 132.137,108.3 124.125,121.025 129.95,124.8
Signal Layer 1:
  region net NetD502_2: 138.463,227.988 132.438,231.838 124.426,219.113 130.251,215.338
  region net NetD503_2: 63.635,228.128 69.66,231.978 77.673,219.253 71.848,215.478
  region net NetD501_2: 63.919,112.125 69.944,108.275 77.956,121 72.131,124.775
  region net NetD500_2: 138.162,112.15 132.137,108.3 124.125,121.025 129.95,124.8
Bottom Layer:
  rectangle net 3V3: 108.33,184.26 109.31,185.45
  region net NetD501_2: 63.924,112.125 69.949,108.275 77.961,121 72.136,124.775
  region net 3V3: 101.5,145.4 101.5,149.3 111.2,149.3 111.2,145.4
  region net NetD502_2: 138.465,227.993 132.44,231.843 124.427,219.118 130.252,215.343
  region net NetD503_2: 63.635,228.128 69.66,231.978 77.673,219.253 71.848,215.478
  region net NetD500_2: 138.162,112.15 132.137,108.3 124.125,121.025 129.95,124.8

## Silkscreen, mask and mechanical layers (free items; w line width, h text height)
Top Overlay:
  text "INT2" at 113.06,175.43 h0.5
  text "ACLK" at 87.6,172.68 h0.5
  text "CS" at 102.49,172.01 h0.5
  text "AMOSI" at 87.42,169.76 h0.5
  text "CLK" at 96.87,167.53 h0.5
  text "AMISO" at 86.4,167.06 h0.5
  text "INT1" at 106.19,165.89 h0.5
  text "ACS#" at 90.71,165.65 h0.5
  text "VLDO" at 90.28,164.45 h0.5
  text "MOSI" at 99.91,163.82 h0.5
  text "MISO" at 103.1,163.63 h0.5
  text "GND" at 113.43,143.36 h0.5
  text "VBATT" at 91.95,142.12 h0.5
  text "3V3" at 105.95,140.7 h1.52
  text "GND" at 92.8,134.7 h1.52
  text "BATT" at 104.2,134.625 h1.52
Bottom Overlay:
  lines w0.3: 101,200 116,200 ; 116,200 116,140 86,140 86,200 116,200
  text "GND" at 117.7,136.01 h0.5
Top Paste:
  circle w0.5: c56,240 r5.25
  circle w0.5: c146,240 r5.25
  circle w0.5: c146,100 r5.25
  circle w0.5: c55.975,99.975 r5.25
Top Solder:
  circle w0.5: c56,240 r5.15
  circle w0.5: c146,240 r5.15
  circle w0.5: c146,100 r5.15
  circle w0.5: c55.975,99.975 r5.15
Mechanical 1:
  lines w0.1: 62.72,95.659 cw(c56,100) 49.28,104.341 75.46,145.064 ccw(c65.028,150.669) 76.87,150.67 76.87,189.33 ccw(c65.028,189.331) 75.46,194.936 49.28,235.659 cw(c56,240) 62.72,244.341 ; 62.729,95.674 84.778,129.971 ; 62.729,244.326 84.778,210.029 ; 84.78,129.97 cw(c90.142,126.475) 90.352,132.872 111.648,132.872 cw(c111.858,126.475) 117.22,129.97 ; 84.78,210.03 ccw(c90.142,213.525) 90.352,207.128 111.648,207.128 ccw(c111.858,213.525) 117.22,210.03 ; 117.222,129.971 139.271,95.674 ; 117.222,210.029 139.271,244.326 ; 139.28,95.659 ccw(c146,100) 152.72,104.341 126.54,145.064 cw(c136.972,150.669) 125.13,150.67 125.13,189.33 cw(c136.972,189.331) 126.54,194.936 152.72,235.659 ccw(c146,240) 139.28,244.341
Bottom Assembly:
  circle w0.254: c146,100 r5.601
Mechanical 14:
  drawing of 155 lines, arcs and shapes, not listed
  text "D" at 29.373,290.558 h7
  text "C" at 81.873,290.558 h7
  text "B" at 134.373,290.558 h7
  text "A" at 186.873,290.558 h7
  text "4" at 202.494,256.365 h7
  text "3" at 202.494,186.115 h7
  text "2" at 202.494,110.865 h7
  text "SCALE" at 186.953,50.369 h1.6
  text "TITLE :" at 23.994,48.24 h3.5
  text "XDRONE" at 34.694,45.99 h8
  text ".Print_Scale" at 183.994,43.74 h3
  text "VARIANTE:" at 92.244,40.34 h4
  text ".variantName" at 113.144,40.34 h4
  text "1" at 202.494,39.615 h7
  text "SCALE" at 187.494,38.99 h3
  text "UNLESS OTHERWISE SPECIFIED" at 23.244,33.99 h4
  text "PART NUMBER" at 87.316,33.899 h3.5
  text "PAGE SIZE" at 161.307,33.89 h3.5
  text "PAGE" at 188.119,33.899 h3.5
  text "DIMENSIONS AND TOLERANCES" at 23.494,29.99 h4
  text "ARE IN MM. AND" at 38.244,25.99 h4
  text "1" at 187.744,24.49 h5
  text "2" at 192.994,24.49 h5
  text "A4" at 166.411,23.44 h10
  text "XDRONE" at 94.867,22.563 h10
  text "XDRONE" at 94.867,22.563 h10
  text "APPLY TO THE FINISHED PART" at 24.494,22.24 h4
  text "TOLERANCE ON :" at 38.244,17.49 h4
  text "2 PLACE DEC" at 24.744,14.74 h2
  text "3 PLACE DEC" at 46.744,14.74 h2
  text "ANGLES" at 70.244,14.49 h2
  text "+/- 0.5" at 25.244,10.99 h4
  text "+/- 0.2" at 46.994,10.99 h4
  text "+/- 0.5°" at 68.744,10.99 h4
  text "D" at 24.994,4.99 h7
  text "C" at 77.494,4.99 h7
  text "B" at 129.994,4.99 h7
  text "A" at 182.494,4.99 h7
Mechanical 15:
  drawing of 155 lines, arcs and shapes, not listed
  text "A" at 23.115,290.558 h7
  text "B" at 75.615,290.558 h7
  text "C" at 128.115,290.558 h7
  text "D" at 180.615,290.558 h7
  text "4" at 7.494,256.365 h7
  text "3" at 7.494,186.115 h7
  text "2" at 7.494,110.865 h7
  text "SCALE" at 23.035,50.369 h1.6
  text "TITLE :" at 185.994,48.24 h3.5
  text "XDRONE" at 175.294,45.99 h8
  text ".Print_Scale" at 25.994,43.74 h3
  text ".variantName" at 96.844,40.34 h4
  text "VARIANTE:" at 117.744,40.34 h4
  text "1" at 7.494,39.615 h7
  text "SCALE" at 22.494,38.99 h3
  text "UNLESS OTHERWISE SPECIFIED" at 186.744,33.99 h4
  text "PAGE" at 21.869,33.899 h3.5
  text "PAGE SIZE" at 48.682,33.89 h3.5
  text "PART NUMBER" at 122.672,33.899 h3.5
  text "DIMENSIONS AND TOLERANCES" at 186.494,29.99 h4
  text "ARE IN MM. AND" at 171.744,25.99 h4
  text "2" at 16.994,24.49 h5
  text "1" at 22.244,24.49 h5
  text "A4" at 43.577,23.44 h10
  text "XDRONE" at 115.121,22.563 h10
  text "XDRONE" at 115.121,22.563 h10
  text "APPLY TO THE FINISHED PART" at 185.494,22.24 h4
  text "TOLERANCE ON :" at 171.744,17.49 h4
  text "3 PLACE DEC" at 163.244,14.74 h2
  text "2 PLACE DEC" at 185.244,14.74 h2
  text "ANGLES" at 139.744,14.49 h2
  text "+/- 0.5°" at 141.244,10.99 h4
  text "+/- 0.2" at 162.994,10.99 h4
  text "+/- 0.5" at 184.744,10.99 h4
  text "A" at 27.494,4.99 h7
  text "B" at 79.994,4.99 h7
  text "C" at 132.494,4.99 h7
  text "D" at 184.994,4.99 h7
Mechanical 29:
  circle w0.254: c146,240 r40
  circle w0.254: c56,240 r40
  circle w0.254: c56,100 r40
  circle w0.254: c146,100 r40
  lines w0.1: 56,100 146,240 ; 56,240 146,100
  lines w0.3: 101,200 116,200 ; 116,200 86,200 86,140 116,140 116,200

## Text inside footprints (layer, text, board x,y; h text height)
B700: Top Assembly "1" at 119.15,178.525 h1 r270; Top Assembly "3" at 115.9,178.675 h1 r270
B701: Top Assembly "1" at 119.15,169.925 h1 r270; Top Assembly "3" at 115.9,170.075 h1 r270
B702: Top Assembly "1" at 119.15,187.025 h1 r270; Top Assembly "3" at 115.9,187.175 h1 r270
D600: Top Assembly "2" at 99.71,156.82 h0.6 r180; Top Assembly "1" at 102.56,156.87 h0.6 r180
D700: Top Assembly "6" at 118.475,154 h0.6 r90; Top Assembly "1" at 118.45,152.2 h0.6 r90; Top Assembly "3" at 120.025,152.1 h0.6 r90
D701: Top Assembly "6" at 116.075,154 h0.6 r90; Top Assembly "1" at 116.05,152.2 h0.6 r90; Top Assembly "3" at 117.625,152.1 h0.6 r90
J100: Top Assembly "1" at 101.6,136.275 h1.52 r270
J700: Top Assembly "10" at 120.175,156.6 h1 r270; Top Assembly "2" at 120.275,161.175 h1 r270; Top Assembly "1" at 116.275,161 h1 r270
J800: Top Assembly "4" at 84.925,180.825 h1.52 r90; Top Assembly "1" at 79.8,176.025 h1.52 r90
M500: Bottom Assembly "1" at 138.055,115.548 h1.52 r302.74; Bottom Assembly "2" at 133.958,112.676 h1.52 r302.74
M501: Bottom Assembly "2" at 62.533,116.218 h1.52 r237.26; Bottom Assembly "1" at 66.847,113.683 h1.52 r237.26
M502: Bottom Assembly "1" at 135.153,226.317 h1.52 r57.26; Bottom Assembly "2" at 139.467,223.782 h1.52 r57.26
M503: Bottom Assembly "2" at 68.042,227.324 h1.52 r122.74; Bottom Assembly "1" at 63.945,224.452 h1.52 r122.74
U200: Top Assembly "3" at 99.825,147.675 h0.6; Top Assembly "1" at 99.9,149.65 h0.6; Top Assembly "5" at 102.4,149.65 h0.6
U201: Top Assembly "5" at 98.89,162.03 h0.6 r90; Top Assembly "1" at 98.89,159.53 h0.6 r90; Top Assembly "3" at 100.865,159.455 h0.6 r90
U300: Top Assembly "14" at 104.075,169.2 h0.4 r90; Top Assembly "1" at 104.375,168.625 h0.4 r90
U400: Top Assembly "1" at 100.25,170.675 h0.5 r90; Top Assembly "8" at 100.25,169.1 h0.5 r90
U500: Bottom Assembly "1" at 127.371,121.904 h0.7 r212.74; Bottom Assembly "6" at 129.299,123.113 h0.7 r212.74
U501: Bottom Assembly "1" at 72.641,123.31 h0.7 r147.26; Bottom Assembly "6" at 74.542,122.059 h0.7 r147.26
U502: Bottom Assembly "1" at 129.569,216.905 h0.7 r327.26; Bottom Assembly "6" at 127.668,218.156 h0.7 r327.26
U503: Bottom Assembly "1" at 74.549,218.341 h0.7 r32.73; Bottom Assembly "6" at 72.621,217.132 h0.7 r32.73
U600: Top Assembly "2" at 109.8,160.08 h0.6 r180; Top Assembly "1" at 109.675,158.105 h0.6 r180
U601: Top Assembly "2" at 109.8,163.98 h0.6 r180; Top Assembly "1" at 109.675,162.005 h0.6 r180
U602: Top Assembly "2" at 109.8,156.08 h0.6 r180; Top Assembly "1" at 109.675,154.105 h0.6 r180
U700: Top Assembly "48" at 105.95,183.8 h0.7 r270; Top Assembly "1" at 105.225,184.425 h0.7 r270
U701: Top Assembly "6" at 88.625,161.475 h0.6 r90; Top Assembly "1" at 88.6,159.675 h0.6 r90; Top Assembly "3" at 90.175,159.575 h0.6 r90
X800: Top Assembly "4" at 98.4,186.9 h0.6; Top Assembly "1" at 98.55,185.275 h0.6